# Altium PCB PCB1.PcbDoc
Units mm, origin at the board's own origin, x right, y up, seen from the top; angles counter-clockwise.
Board outline 100.08 x 99.82 mm, 2 copper layers (Top Layer, Bottom Layer); 33 components, 19 nets, 87 pads, 0 vias.
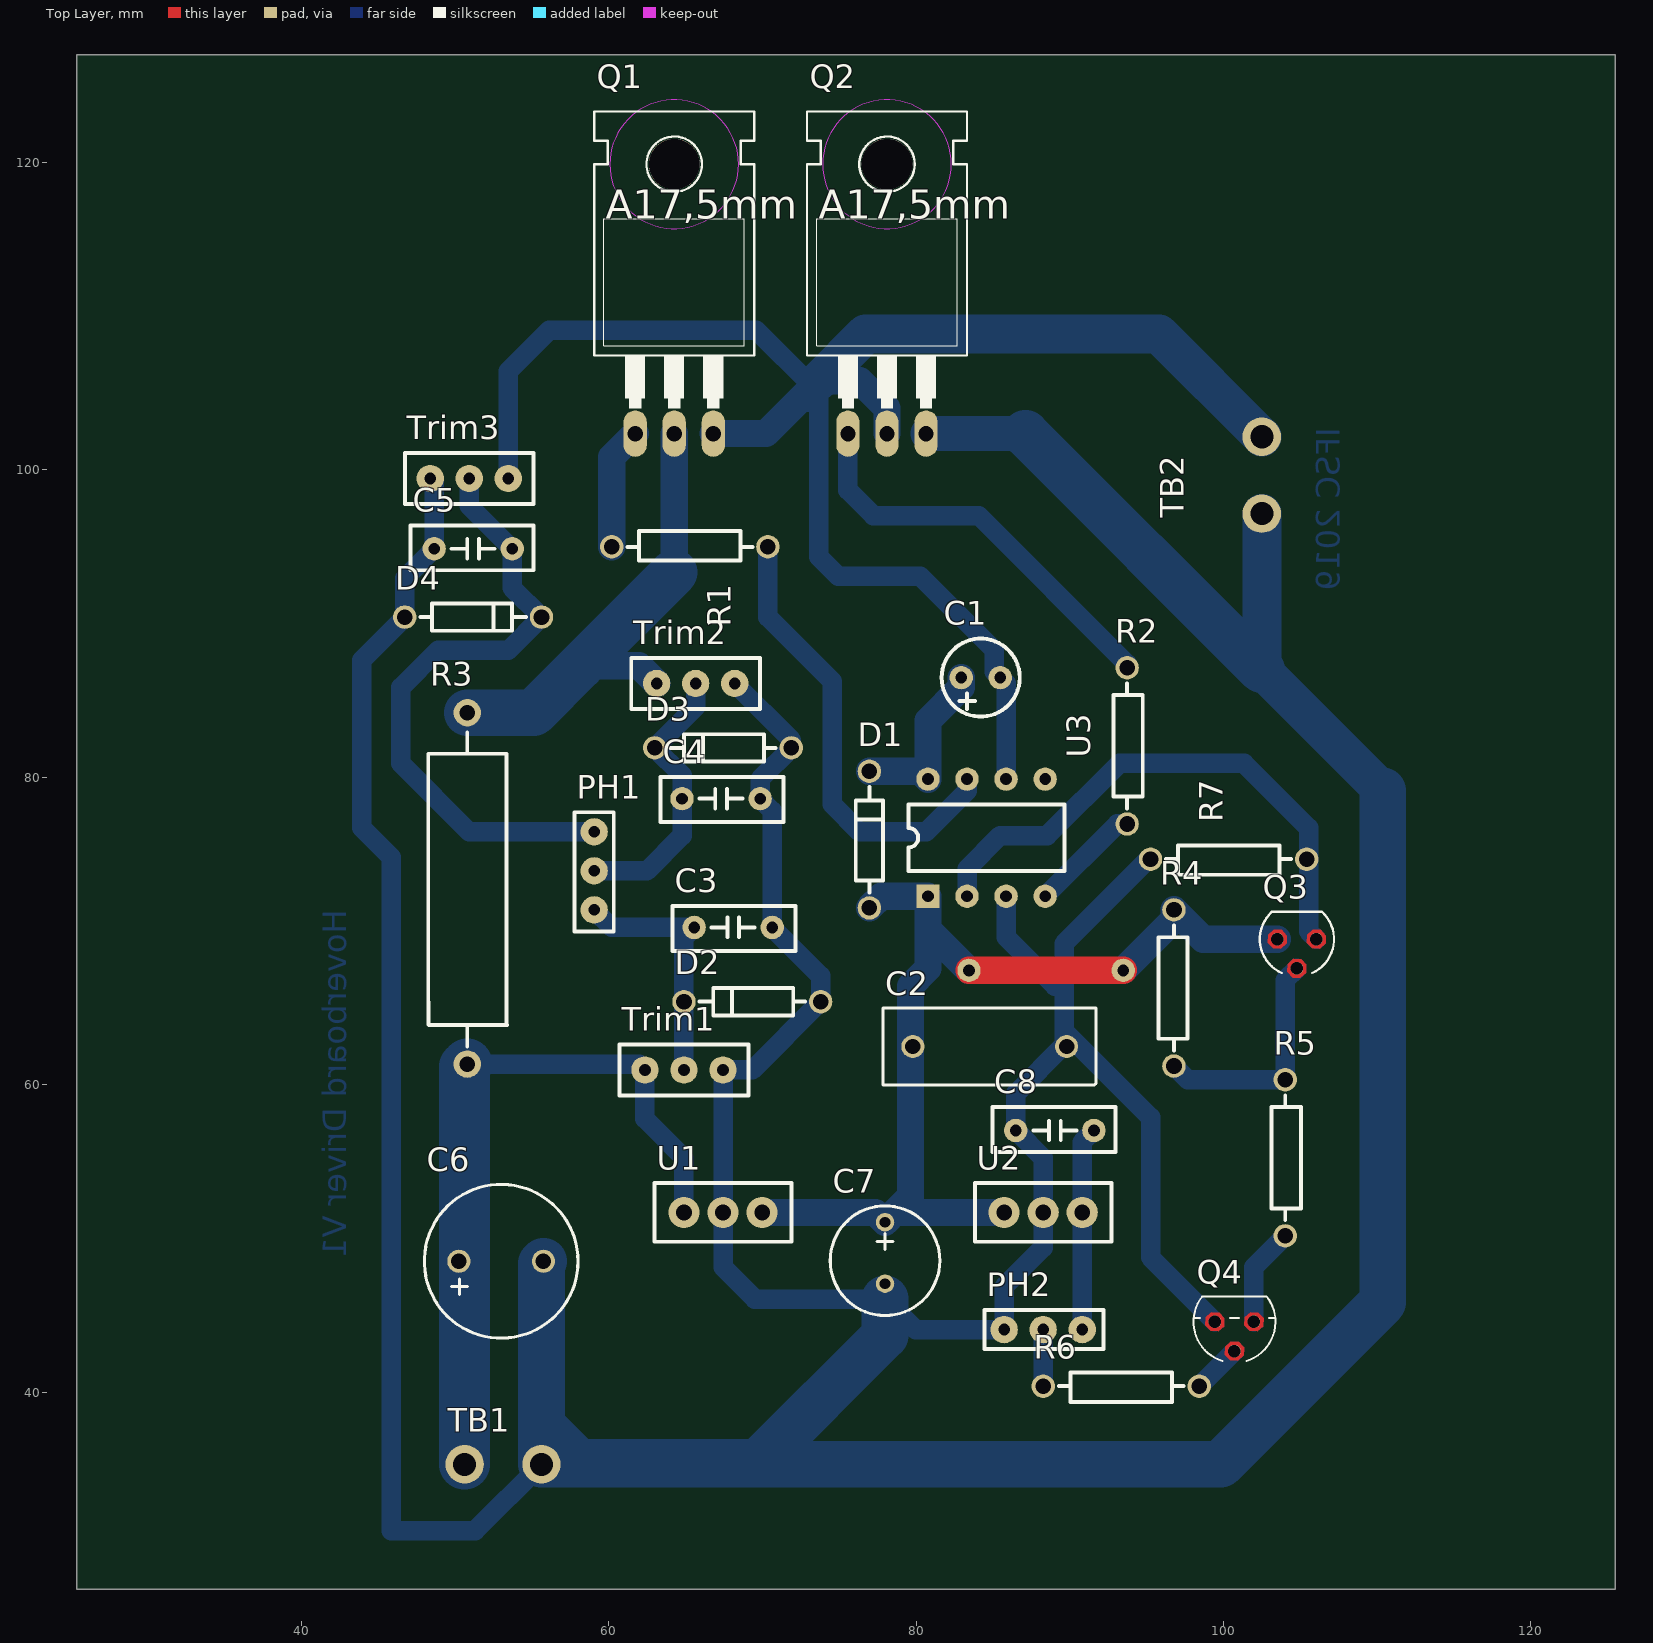
[diagram p0: Top Layer view]
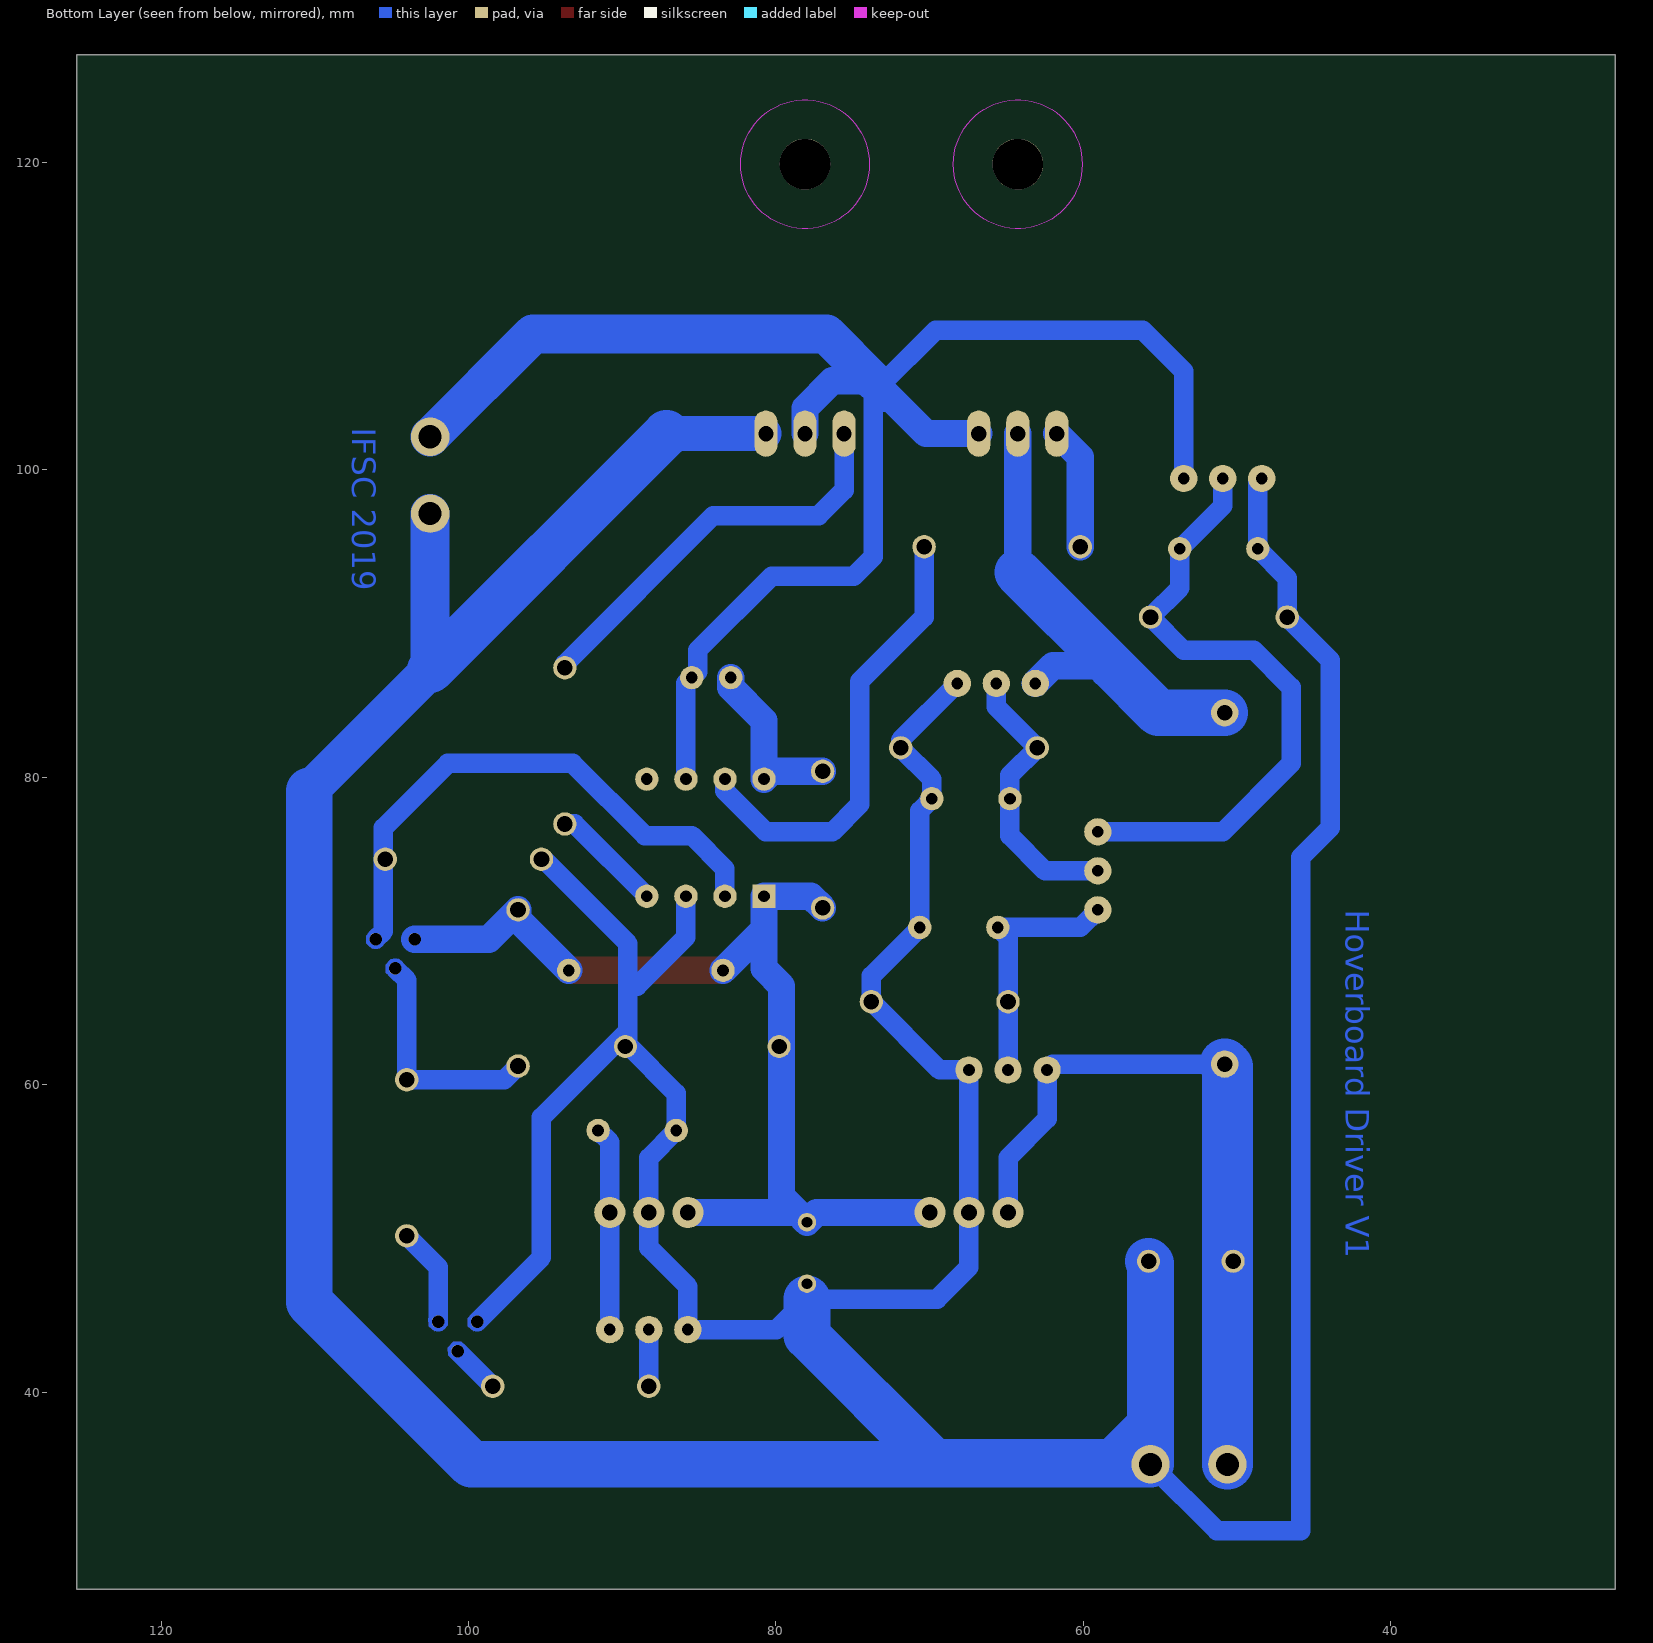
[diagram p1: Bottom Layer view, seen from below]

## Layer stack, top to bottom
Top Solder: solder mask 0.0102, Solder Resist, Dk 3.5
Top Layer: signal copper 0.0356
Dielectric 1: dielectric 0.32, FR-4, Dk 4.8
Bottom Layer: signal copper 0.0356
Bottom Solder: solder mask 0.0102, Solder Resist, Dk 3.5

## Board outline
25.4,27.178 25.4,127 125.476,127 125.476,27.178

## Design rules (kind name [scope] priority, off if disabled: settings)
Clearance [All] p1: gap=0.508 ignorepadtopadclearanceinfootprint=FALSE
PolygonConnect [All] p1: connectstyle=Relief reliefconductorwidth=0.254 reliefentries=4 polygonreliefangle="90 Angle" airgapwidth=0.254
RoutingVias [All] p1: holewidth=0.711 width=1.27 viastyle="Through Hole" minholewidth=0.711 minwidth=1.27 maxholewidth=0.711 maxwidth=1.27
SolderMaskExpansion [All] p1: expansion=0.102
Width [All] p1: maxlimit=5.08 minlimit=0.254 preferedwidth=1.27
30 further rules are at their usual default settings.

## Components (designator, comment, footprint, x,y, rotation, side; value= is the part's Value field where it differs from the comment)
C1 "47uF 50V" "Capacitor POL 2.2mm(100mil)" 85.471,86.487 r180 top
C2 "100nF" "Capacitor 100n (cor verniz)" 89.789,62.484 r180 top
C3 "Capacitor 220nf 63V" "Capacitor NPOL 5mm(200mils)" 70.637,70.231 r180 top
C4 "Capacitor 220nf 63V" "Capacitor NPOL 5mm(200mils)" 69.85,78.613 r180 top
C5 "Capacitor 220nf 63V" "Capacitor NPOL 5mm(200mils)" 48.641,94.869 r0 top
C6 "Capacitor 1000uf 25V" "Capacitor 1000u 25V" 55.753,48.514 r180 top
C7 "Capacitor 220uf 63V" "Capacitor 220uf 63V" 77.978,46.054 r90 top
C8 "Capacitor 220nf 63V" "Capacitor NPOL 5mm(200mils)" 86.487,57.023 r0 top
D1 "1N4148" "Diode 8.89mm(350mils)" 76.962,71.501 r90 top
D2 "Diode 1N4148" "Diode 8.89mm(350mils)" 73.787,65.405 r180 top
D3 "Diode 1N4148" "Diode 8.89mm(350mils)" 71.882,81.915 r180 top
D4 "Diode 1N4148" "Diode 8.89mm(350mils)" 46.736,90.424 r0 top
PH1 "PinHead3" PINHEAD3 59.055,76.454 r270 top
PH2 "PinHead3" PINHEAD3 85.725,44.069 r0 top
Q1 "IRF540" IRF540 61.722,102.362 r0 top
Q2 "IRF540" IRF540 75.565,102.362 r0 top
Q3 "BC327" BC327 106.045,69.469 r180 top
Q4 "BC337" BC337 101.981,44.577 r180 top
R1 "Resistor 0.4" "Resistor Axial 0.4" 70.358,94.996 r180 top
R2 "Resistor 0.4" "Resistor Axial 0.4" 93.726,76.962 r90 top
R3 "Resistor 0.9(3W)" "Resistor Axial 0.9(3W)" 50.8,61.341 r90 top
R4 "Resistor 0.4" "Resistor Axial 0.4" 96.774,71.374 r270 top
R5 "Resistor 0.4" "Resistor Axial 0.4" 104.013,50.165 r90 top
R6 "Resistor 0.4" "Resistor Axial 0.4" 88.265,40.386 r0 top
R7 "Resistor 0.4" "Resistor Axial 0.4" 95.25,74.676 r0 top
TB1 "TBlock" TBlock 55.626,35.306 r180 top
TB2 "TBlock" TBlock 102.489,102.155 r270 top
Trim1 "Trimpot" TRIMPOT 62.357,60.96 r0 top
Trim2 "Trimpot" TRIMPOT 63.119,86.106 r0 top
Trim3 "Trimpot" TRIMPOT 53.467,99.441 r180 top
U1 "7815" LM317/337 65.024,51.689 r0 top
U2 "7809" LM317/337 85.852,51.689 r0 top
U3 "IR2111" DIP8 80.772,72.263 r90 top

## Footprints (in the part's own frame and the unit in brackets; to place one, negate y for a bottom-side part, rotate by r counter-clockwise, add the part's x,y. Pads: shape width x height; smd on the part's side, far side on the other; paste and mask are expansions set on the pad)
BC327 [mil]
  round 32 hole 32: B(50,75) C(0,0) E(100,0)
  Top Layer region: 24.43,8.89 10.99,23.56 -8.89,24.43 -23.56,10.99 -24.43,-8.89 -10.99,-23.56 8.89,-24.43 23.56,-10.99
  Top Layer region: 74.43,83.89 60.99,98.56 41.11,99.43 26.44,85.99 25.57,66.11 39.01,51.44 58.89,50.57 73.56,64.01
  Top Layer region: 124.43,8.89 110.99,23.56 91.11,24.43 76.44,10.99 75.57,-8.89 89.01,-23.56 108.89,-24.43 123.56,-10.99
  Bottom Layer region: 24.43,8.89 10.99,23.56 -8.89,24.43 -23.56,10.99 -24.43,-8.89 -10.99,-23.56 8.89,-24.43 23.56,-10.99
  Bottom Layer region: 74.43,83.89 60.99,98.56 41.11,99.43 26.44,85.99 25.57,66.11 39.01,51.44 58.89,50.57 73.56,64.01
  Bottom Layer region: 124.43,8.89 110.99,23.56 91.11,24.43 76.44,10.99 75.57,-8.89 89.01,-23.56 108.89,-24.43 123.56,-10.99
  Multi-Layer region: 24.43,8.89 10.99,23.56 -8.89,24.43 -23.56,10.99 -24.43,-8.89 -10.99,-23.56 8.89,-24.43 23.56,-10.99
  Multi-Layer region: 74.43,83.89 60.99,98.56 41.11,99.43 26.44,85.99 25.57,66.11 39.01,51.44 58.89,50.57 73.56,64.01
  Multi-Layer region: 124.43,8.89 110.99,23.56 91.11,24.43 76.44,10.99 75.57,-8.89 89.01,-23.56 108.89,-24.43 123.56,-10.99
  silkscreen extent -45,-70 145,87
BC337 [mil]
  round 32 hole 32: 1(100,0) 2(50,75) 3(0,0)
  Top Layer region: 124.43,8.89 110.99,23.56 91.11,24.43 76.44,10.99 75.57,-8.89 89.01,-23.56 108.89,-24.43 123.56,-10.99
  Top Layer region: 74.43,83.89 60.99,98.56 41.11,99.43 26.44,85.99 25.57,66.11 39.01,51.44 58.89,50.57 73.56,64.01
  Top Layer region: 24.43,8.89 10.99,23.56 -8.89,24.43 -23.56,10.99 -24.43,-8.89 -10.99,-23.56 8.89,-24.43 23.56,-10.99
  Bottom Layer region: 124.43,8.89 110.99,23.56 91.11,24.43 76.44,10.99 75.57,-8.89 89.01,-23.56 108.89,-24.43 123.56,-10.99
  Bottom Layer region: 74.43,83.89 60.99,98.56 41.11,99.43 26.44,85.99 25.57,66.11 39.01,51.44 58.89,50.57 73.56,64.01
  Bottom Layer region: 24.43,8.89 10.99,23.56 -8.89,24.43 -23.56,10.99 -24.43,-8.89 -10.99,-23.56 8.89,-24.43 23.56,-10.99
  Multi-Layer region: 124.43,8.89 110.99,23.56 91.11,24.43 76.44,10.99 75.57,-8.89 89.01,-23.56 108.89,-24.43 123.56,-10.99
  Multi-Layer region: 74.43,83.89 60.99,98.56 41.11,99.43 26.44,85.99 25.57,66.11 39.01,51.44 58.89,50.57 73.56,64.01
  Multi-Layer region: 24.43,8.89 10.99,23.56 -8.89,24.43 -23.56,10.99 -24.43,-8.89 -10.99,-23.56 8.89,-24.43 23.56,-10.99
  silkscreen extent -55,-65 155,100
"Capacitor 100n (cor verniz)" [mm]
  round 1.5 hole 1: 1(0,0) 2(10,0)
  silkscreen extent -1.91,-2.5 11.94,2.5
"Capacitor 220uf 63V" [mm]
  round 1.2 hole 0.7: 1(1,0) 2(5,0)
  silkscreen extent -1.07,-3.57 6.07,3.57
"Capacitor 1000u 25V" [mm]
  round 1.5 hole 1: 1(0,0) 2(5.5,0)
  silkscreen extent -2.25,-5 7.75,5
"Capacitor NPOL 5mm(200mils)" [mil]
  round 60 hole 30: 1(0,0) 2(200,0)
  silkscreen extent -60,-55 255,60
"Capacitor POL 2.2mm(100mil)" [mil]
  round 60 hole 30: 1(0,0) 2(100,0)
  silkscreen extent -50,-100 150,100
"Diode 8.89mm(350mils)" [mil]
  round 60 hole 40: A(0,0) K(350,0)
  silkscreen extent 40,-35 310,35
DIP8 [mil]
  rect 60x60 hole 30: 1(0,0)
  round 60 hole 30: 2(0,-100) 3(0,-200) 4(0,-300) 5(300,-300) 6(300,-200) 7(300,-100) 8(300,0)
  silkscreen extent 65,-350 235,50
IRF540 [mil]
  oval 59.37x118.74 hole 39.37: 1(0,0) 2(100,0) 3(200,0)
  round 130 hole 130 unplated: None(100,690)
  Keep-Out Layer circle w0: c100,690 r165
  Keep-Out Layer circle w0: c100,690 r165
  Keep-Out Layer circle w0: c100,690 r165
  Keep-Out Layer circle w0: c100,690 r165
  Keep-Out Layer circle w0: c100,690 r165
  Keep-Out Layer circle w0: c100,690 r165
  silkscreen extent -105,65 305,825
LM317/337 [mil]
  round 80 hole 40: 1(-5,0) 2(95,0) 3(195,0)
  silkscreen extent -80,-75 270,75
PINHEAD3 [mil]
  round 70 hole 30: 1(0,0) 2(100,0) 3(200,0)
  silkscreen extent -50,-50 255,50
"Resistor Axial 0.4" [mil]
  round 60 hole 40: 1(0,0) 2(400,0)
  silkscreen extent 40,-40 360,35
"Resistor Axial 0.9(3W)" [mil]
  round 70 hole 40: 1(0,0) 2(900,0)
  silkscreen extent 45,-101 850,100
TBlock [mm]
  round 2.5 hole 1.5: 1(0,0) 2(5,0)
TRIMPOT [mil]
  round 70 hole 30: 1(0,0) 2(100,0) 3(200,0)
  silkscreen extent -65,-65 265,65

## Part data
C1: library part "Capacitor 47uF 50V"
C2: library part "Capacitor 100n 250V (Verniz)"
D1: library part "Diode 1N4148"
U1 U2: library part LM78XX

## Free pads (board coordinates)
  round 1.524 hole 0.762: JP1(83.439,67.437) JP2(93.472,67.437)

## Nets (pads, with @x,y where several pads share a name; then routed paths per layer and width w, separated by ;. In a path a pad name is that pad's centre, name@x,y a point inside that pad or via, vN(x,y) a via of type N, cw(c..) or ccw(c..) an arc to the next point about the centre after c; other vN are vias at no path point)
9V: C8.2 PH2.3 U2.3 | length 13.3
  Bottom Layer w1.27: PH2.3 U2.3 90.805,56.261 C8.2
15V: C2.2 C7.2 D1.A pad.JP1 pad.JP2 Q3.E R4.1 U1.3 U2.1 U3.1 | length 68.4
  Top Layer w1.778: pad.JP1 pad.JP2
  Bottom Layer w1.778: U1.3 77.343,51.689 C7.2 78.613,51.689 ; D1.A 77.724,72.263 U3.1 80.772,69.85 ; pad.JP1 81.026,69.85 80.772,69.85 ; U2.1 78.613,51.689 ; pad.JP2 96.774,70.739 R4.1 98.679,69.469 Q3.E ; 78.613,51.689 79.629,52.705 79.629,66.421 80.772,67.564 80.772,69.85
GND: C2.1 C3.1 C4.1 C5.1 C6.1 C7.1 C8.1 D2.A D3.A D4.A PH2.1 Q2.3 Q4.1 R7.1 TB1.1 TB2.2 Trim1.3 Trim2.3 Trim3.3 U1.2 U2.2 U3.3 | length 399.4
  Bottom Layer w1.27: Trim3.3 48.641,99.187 C5.1 46.736,92.964 D4.A 43.942,87.63 43.942,76.708 45.847,74.803 45.847,30.988 51.308,30.988 TB1.1 ; Trim2.3 71.882,82.423 D3.A 69.85,79.883 C4.1 70.637,77.826 C3.1 73.787,67.081 D2.A 69.342,60.96 Trim1.3 U1.2 67.437,48.133 69.516,46.054 77.978,46.054 79.963,44.069 PH2.1 85.725,46.863 88.265,49.403 U2.2 88.265,55.245 C8.1 86.487,59.436 89.629,62.578 89.629,63.5 ; U3.3 85.852,69.596 89.027,66.421 89.629,66.421 ; R7.1@95.123,74.676 89.629,69.182 89.629,66.421 ; Q4.1 95.25,48.768 95.25,57.879 89.629,63.5 ; 89.629,63.5 89.629,66.421
  Bottom Layer w2.286: Q2.3@80.772,102.362 87.122,102.362
  Bottom Layer w2.54: TB2.2 102.489,86.995 110.363,79.121
  Bottom Layer w3.048: C6.1 55.626,48.387 55.626,37.846 ; 77.978,46.054 77.978,43.688 69.723,35.433 58.039,35.433 55.626,37.846 ; 87.122,102.362 102.489,86.995 ; 110.363,79.121 110.363,45.847 99.822,35.306 TB1.1 55.626,37.846
IRIN: Q3.C R7.2 U3.2 | length 36
  Bottom Layer w1.27: U3.2 83.312,74.041 85.471,76.2 88.519,76.2 93.218,80.899 101.346,80.899 105.537,76.708 105.537,69.977 Q3.C
Mid_Point: C1.1 Q1.3 Q2.2 TB2.1 Trim3.1 U3.6 | length 112.9
  Bottom Layer w1.27: Trim3.1 53.467,106.426 56.134,109.093 69.596,109.093 73.279,105.41 73.406,105.283 73.406,104.394 73.025,104.394 ; 73.66,105.791 73.66,94.361 74.93,93.091 80.264,93.091 85.09,88.265 85.09,86.868 C1.1 85.852,86.106 U3.6
  Bottom Layer w1.778: Q1.3 70.231,102.362 73.279,105.41 73.66,105.791 75.057,105.791 76.327,105.791 78.105,104.013 Q2.2
  Bottom Layer w2.54: 73.66,105.791 76.708,108.839 95.805,108.839 TB2.1
Mid_PointSense: C5.2 D4.K PH1.1 Trim3.2 | length 41.4
  Bottom Layer w1.27: Trim3.2 50.927,97.663 C5.2 53.721,92.329 D4.K 53.467,88.265 48.895,88.265 46.482,85.852 46.482,80.899 50.927,76.454 PH1.1
NetC1_2: C1.2 D1.K U3.8 | length 11.5
  Bottom Layer w1.778: D1.K 80.264,80.391 U3.8 80.772,83.693 82.931,85.852 C1.2
NetC6_2: C6.2 R3.1 TB1.2 Trim1.1 U1.1 | length 48.1
  Bottom Layer w1.27: R3.1 61.976,61.341 Trim1.1 62.357,57.785 64.897,55.245 U1.1
  Bottom Layer w3.302: TB1.2 50.626,61.167 R3.1
NetQ1_1: Q1.1 R1.2 | length 8
  Bottom Layer w1.778: R1.2 60.198,100.838 Q1.1
NetQ2_1: Q2.1 R2.2 | length 26.8
  Bottom Layer w1.27: Q2.1 75.565,98.679 77.216,97.028 84.074,97.028 93.726,87.376 R2.2
NetQ3_B: Q3.B R4.2 R5.2 | length 15.2
  Bottom Layer w1.27: R4.2 97.663,60.325 R5.2 104.013,66.802 Q3.B
NetQ4_2: Q4.2 R6.2 | length 3.2
  Bottom Layer w1.27: R6.2 Q4.2
NetQ4_3: Q4.3 R5.1 | length 6.4
  Bottom Layer w1.27: Q4.3 101.981,48.133 R5.1
NetR1_1: R1.1 U3.7 | length 29.9
  Bottom Layer w1.27: R1.1 70.358,90.424 74.549,86.233 74.549,78.232 76.327,76.454 80.645,76.454 83.312,79.121 U3.7
NetR2_1: R2.1 U3.4 | length 7.3
  Bottom Layer w1.27: U3.4 93.091,76.962 R2.1
PWM_IN: PH2.2 R6.1 | length 3.7
  Bottom Layer w1.27: R6.1 PH2.2
VCC: Q1.2 R3.2 Trim2.1 | length 31.7
  Bottom Layer w1.778: 58.166,87.249 61.976,87.249 Trim2.1 ; 64.262,93.345 Q1.2
  Bottom Layer w3.048: R3.2 55.118,84.201 58.166,87.249 64.262,93.345
VccSense: C4.2 D3.K PH1.2 Trim2.2 | length 18.4
  Bottom Layer w1.27: PH1.2 62.484,73.914 64.77,76.2 C4.2 64.77,80.137 D3.K 65.659,84.582 Trim2.2
VinSense: C3.2 D2.K PH1.3 Trim1.2 | length 16.5
  Bottom Layer w1.27: PH1.3 60.198,70.231 C3.2 64.897,69.571 D2.K Trim1.2
pads on no net: Q1.None Q2.None U3.5

## Other copper
Bottom Layer:
  text "IFSC 2019" at 107.569,102.743 h1.52 r90
  text "Hoverboard Driver V1" at 42.926,71.374 h1.52 r90

## Text inside footprints (layer, text, board x,y; h text height)
Q1: Top Overlay "A17,5mm" at 59.817,116.336 h1.88; Mechanical 4 "3" at 66.167,108.462 h1.88; Mechanical 4 "2" at 63.627,108.462 h1.88; Mechanical 4 "1" at 61.087,108.462 h1.88; Mechanical 4 "3" at 66.167,108.462 h1.88; Mechanical 4 "2" at 63.627,108.462 h1.88; Mechanical 4 "1" at 61.087,108.462 h1.88
Q2: Top Overlay "A17,5mm" at 73.66,116.336 h1.88; Mechanical 4 "3" at 80.01,108.462 h1.88; Mechanical 4 "2" at 77.47,108.462 h1.88; Mechanical 4 "1" at 74.93,108.462 h1.88; Mechanical 4 "3" at 80.01,108.462 h1.88; Mechanical 4 "2" at 77.47,108.462 h1.88; Mechanical 4 "1" at 74.93,108.462 h1.88
Q4: Mechanical 4 "2" at 101.346,44.192 h1.88 r180; Mechanical 4 "3" at 102.87,44.827 h1.88 r180; Mechanical 4 "1" at 99.568,44.827 h1.88 r180; Mechanical 4 "2" at 101.346,44.192 h1.88 r180; Mechanical 4 "3" at 102.87,44.827 h1.88 r180; Mechanical 4 "1" at 99.568,44.827 h1.88 r180